# Altium PCB 第三版PCB_ASCII.pcbdoc (part 2 of 2)
Units mm, origin at the board's own origin, x right, y up, seen from the top; angles counter-clockwise.
Board outline 100 x 24 mm, 4 copper layers (Top Layer, GND, VCC, Bottom Layer), stack 0.568 mm thick; 97 components, 64 nets, 369 pads, 320 vias.
Unrouted connection lines stored in the file: 80.
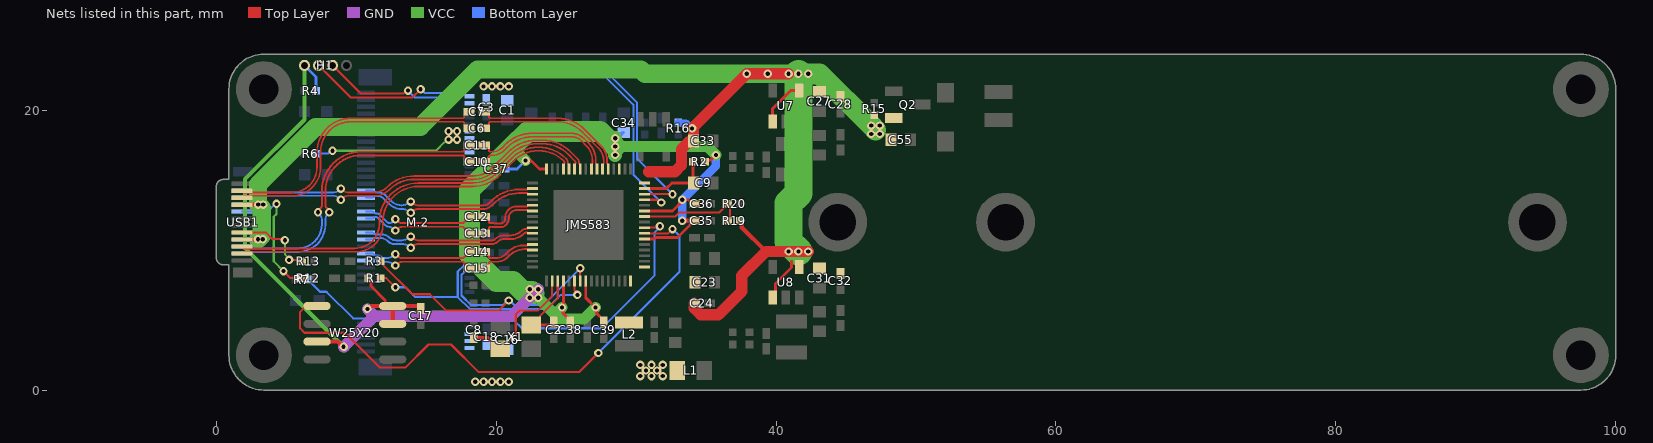
[diagram p4: the nets of this part, all layers, seen from the top]

## Via types
v1: diameter 0.6, hole 0.3, Top Layer to Bottom Layer, tented both sides, 320 vias

## Nets (pads, with @x,y where several pads share a name; then routed paths per layer and width w, separated by ;. In a path a pad name is that pad's centre, name@x,y a point inside that pad or via, vN(x,y) a via of type N, cw(c..) or ccw(c..) an arc to the next point about the centre after c; other vN are vias at no path point) (continued)
GPIO3: JMS583.7 W25X20.1 | length 40.7
  Top Layer w0.15: W25X20.1@7.195,6.005 6.415,6.005 5.995,5.584 5.995,4.405 6.3,4.1 9.2,4.1 11.7,1.6 13.5,1.6 15.16,3.26 16.766,3.26 18.726,1.3 25.95,1.3 v1(27.3,2.65) ; JMS583.7@30.6,11.2 32.287,11.2 32.587,11.5 v1(32.6,11.5)
  Bottom Layer w0.15: v1(27.3,2.65) 33.095,8.445 33.095,11.025 32.62,11.5 v1(32.6,11.5)
GPIO4: JMS583.8 R7.1 | length 32.6
  Top Layer w0.15: JMS583.8@30.6,11.6 30.625,11.625 31.625,11.625 v1(31.7,11.7)
  Bottom Layer w0.15: R7.1@6.533,7.9 7.408,7.025 7.844,7.025 7.869,7 7.9,7 9.775,5.125 11.443,5.125 11.603,4.965 21.303,4.965 21.848,4.42 27.543,4.42 31.3,8.177 31.3,11.251 31.7,11.651 v1(31.7,11.7)
GPIO6: JMS583.10 R19.2 R20.1 | length 7.7
  Top Layer w0.15: JMS583.10@30.6,12.4 32.8,12.4 33.1,12.7 35.954,12.7 36.554,13.3 R20.1@36.567,13.3 36.7,13.167 36.7,12.233 R19.2@36.567,12.1
GPIO8: H1.3 JMS583.13 | length 33.2
  Top Layer w0.15: H1.3@8.3,23.2 10.3,21.2 13.387,21.2 13.587,21.4 v1(13.7,21.4) ; JMS583.13@30.6,13.6 31.478,13.6 31.678,13.4 v1(31.8,13.4)
  Bottom Layer w0.15: v1(13.7,21.4) 14.2,20.9 16.9,20.9 18.4,22.4 27.8,22.4 29.8,20.4 29.8,15.4 v1(31.8,13.4)
GPIO9: H1.2 JMS583.14 | length 35.2
  Top Layer w0.15: H1.2@7.3,23.2 9.597,20.903 14.002,20.903 v1(14.6,21.5) ; JMS583.14@30.6,14 v1(32.6,14)
  Bottom Layer w0.15: v1(14.6,21.5) 14.635,21.5 14.913,21.223 16.723,21.223 18.2,22.7 27.9,22.7 30.07,20.53 30.07,16.53 v1(32.6,14)
LXO: JMS583.64 L2.2
M.2_3V3: C1.1 C3.2 C16.1 C18.2 L1.2 M.2.2 M.2.4 M.2.12 M.2.14 M.2.16 M.2.18 M.2.70 M.2.72 M.2.74 R6.1 | length 9.5
  VCC w0.15: v1(8.3,17.1) 15.7,17.1 16.3,17.7
  Bottom Layer w0.15: R6.1@7.133,16.9 7.978,16.9 8.178,17.1 v1(8.3,17.1)
  other v1: 18.5,0.6 19.1,0.6 19.7,0.6 20.3,0.6 20.9,0.6 30.3,1 31.1,1 31.9,1 30.7,1.4 31.5,1.4 30.3,1.8 31.1,1.8 31.9,1.8 16.6,17.9 17.2,17.9 16.6,18.5 17.2,18.5 19.1,21.7 19.7,21.7 20.3,21.7 20.9,21.7
N_P0_TX_N: C14.2 M.2.47 | length 8.2
  Top Layer w0.14: C14.2@17.841,9.812 17.796,9.766 ccw(c17.957,9.606) 17.73,9.606 17.73,9.57 cw(c17.59,9.57) 17.689,9.471 cw(c17.59,9.57) 17.59,9.43 13.303,9.43 cw(c13.303,9.891) 12.977,9.565 v1@12.872,9.67 ; C14.2@17.842,9.812 cw(c18.055,9.598) C14.2@18.055,9.9 ccw(c18.055,9.772) 17.965,9.863 C14.2@17.868,9.766 ; v1@12.872,9.67 ccw(c12.8,9.599) v1(12.8,9.7) cw(c12.8,9.599) v1@12.872,9.67
  Bottom Layer w0.14: M.2.47@10.7,9.75 11.115,9.75 cw(c11.115,9.545) 11.26,9.69 ccw(c11.405,9.835) 11.405,9.63 11.511,9.63 cw(c11.511,9.289) 11.753,9.53 ccw(c11.994,9.771) 11.994,9.43 12.17,9.43 ccw(c12.17,10.197) 12.713,9.655 12.728,9.67 cw(c12.8,9.599) v1(12.8,9.7)
N_P0_TX_P: C15.2 M.2.49 | length 8.2
  Top Layer w0.14: C15.2@17.841,8.788 17.796,8.834 cw(c17.957,8.994) 17.73,8.994 17.73,9.03 ccw(c17.59,9.03) 17.689,9.129 ccw(c17.59,9.03) 17.59,9.17 13.303,9.17 ccw(c13.303,8.709) 12.977,9.035 v1@12.872,8.93 ; C15.2@17.842,8.788 ccw(c18.055,9.002) C15.2@18.055,8.7 cw(c18.055,8.828) 17.964,8.737 C15.2@17.868,8.834 ; v1@12.872,8.93 cw(c12.8,9.001) v1(12.8,8.9) ccw(c12.8,9.001) v1@12.872,8.93
  Bottom Layer w0.14: M.2.49@10.7,9.25 11.115,9.25 ccw(c11.115,9.455) 11.26,9.31 cw(c11.405,9.165) 11.405,9.37 11.433,9.37 cw(c11.433,9.098) 11.625,9.29 11.645,9.27 ccw(c11.886,9.511) 11.886,9.17 12.148,9.17 cw(c12.148,8.35) 12.728,8.93 ccw(c12.8,9.001) v1(12.8,8.9)
N_P1_TX_N: C12.2 M.2.35 | length 8.4
  Top Layer w0.14: C12.2@17.841,12.312 17.796,12.266 ccw(c17.957,12.106) 17.73,12.106 17.73,12.07 cw(c17.59,12.07) 17.689,11.971 cw(c17.59,12.07) 17.59,11.93 13.303,11.93 cw(c13.303,12.391) 12.977,12.065 v1@12.872,12.17 ; C12.2@17.842,12.312 cw(c18.055,12.098) C12.2@18.055,12.4 ccw(c18.055,12.272) 17.965,12.363 C12.2@17.868,12.266 ; v1@12.872,12.17 ccw(c12.8,12.099) v1(12.8,12.2) cw(c12.8,12.099) v1@12.872,12.17
  Bottom Layer w0.14: M.2.35@10.7,12.75 11.115,12.75 cw(c11.115,12.545) 11.26,12.69 ccw(c11.405,12.835) 11.405,12.63 11.453,12.63 cw(c11.453,12.309) 11.68,12.536 12.214,12.002 ; 12.214,12.001 ccw(c12.387,12.174) 12.387,11.93 ccw(c12.387,12.174) 12.559,12.001 12.728,12.17 cw(c12.8,12.099) v1(12.8,12.2)
N_P1_TX_P: C13.2 M.2.37 | length 8.4
  Top Layer w0.14: C13.2@17.841,11.288 17.796,11.334 cw(c17.957,11.494) 17.73,11.494 17.73,11.53 ccw(c17.59,11.53) 17.689,11.629 ccw(c17.59,11.53) 17.59,11.67 13.303,11.67 ccw(c13.303,11.209) 12.977,11.535 v1@12.872,11.43 ; C13.2@17.842,11.288 ccw(c18.055,11.502) C13.2@18.055,11.2 cw(c18.055,11.328) 17.964,11.237 C13.2@17.868,11.334 ; v1@12.872,11.43 cw(c12.8,11.501) v1(12.8,11.4) ccw(c12.8,11.501) v1@12.872,11.43
  Bottom Layer w0.14: M.2.37@10.7,12.25 11.109,12.25 ccw(c11.109,12.469) 11.264,12.314 cw(c11.399,12.179) 11.399,12.37 cw(c11.399,12.179) 11.534,12.314 12.068,11.78 ccw(c12.333,12.044) 12.333,11.67 cw(c12.333,11.296) 12.598,11.56 12.728,11.43 ccw(c12.8,11.501) v1(12.8,11.4)
P0_RX_N: JMS583.41 M.2.41 | length 12.4
  Top Layer w0.14: v1(13.9,10.97) cw(c13.9,10.869) 13.972,10.94 14.077,10.835 ccw(c14.403,11.161) 14.403,10.7 19.216,10.7 ; 19.217,10.7 19.216,10.7 ; JMS583.41@22.6,11.6 22.35,11.6 ccw(c22.35,11.481) 22.265,11.565 cw(c22.18,11.65) 22.18,11.53 ccw(c22.18,11.008) 21.811,11.377 cw(c21.046,12.143) 21.046,11.06 20.583,11.06 ccw(c20.583,10.117) 19.916,10.784 cw(c19.714,10.986) 19.714,10.7 19.216,10.7
  Bottom Layer w0.14: M.2.41@10.7,11.25 11.115,11.25 cw(c11.115,11.045) 11.26,11.19 ccw(c11.405,11.335) 11.405,11.13 11.832,11.13 cw(c11.832,10.396) 12.351,10.915 ccw(c12.87,11.434) 12.87,10.7 13.248,10.7 ccw(c13.248,11.52) 13.828,10.94 cw(c13.9,10.869) v1(13.9,10.97)
P0_RX_P: JMS583.42 M.2.43 | length 12.4
  Top Layer w0.14: v1(13.9,10.17) ccw(c13.9,10.271) 13.972,10.2 14.077,10.305 cw(c14.403,9.979) 14.403,10.44 19.313,10.44 ; 19.323,10.44 19.714,10.44 ccw(c19.714,10.986) 20.1,10.6 cw(c20.583,10.117) 20.583,10.8 21.046,10.8 ccw(c21.046,12.143) 21.995,11.193 cw(c22.18,11.008) 22.18,11.27 cw(c22.18,11.151) 22.265,11.235 ccw(c22.35,11.32) 22.35,11.2 JMS583.42@22.6,11.2
  Bottom Layer w0.14: M.2.43@10.7,10.75 11.115,10.75 ccw(c11.115,10.955) 11.26,10.81 cw(c11.405,10.665) 11.405,10.87 11.674,10.87 cw(c11.674,10.015) 12.279,10.62 12.311,10.587 ccw(c12.666,10.943) 12.666,10.44 13.248,10.44 cw(c13.248,9.62) 13.828,10.2 ccw(c13.9,10.271) v1(13.9,10.17)
P0_TX_N: C14.1 JMS583.44 | length 4.2
  Top Layer w0.14: C14.1@19.306,9.792 19.236,9.862 ccw(c19.145,9.772) C14.1@19.145,9.9 cw(c19.145,9.598) 19.358,9.812 19.404,9.766 cw(c19.243,9.606) 19.47,9.606 19.47,9.57 ccw(c19.61,9.57) 19.511,9.471 ccw(c19.61,9.57) 19.61,9.43 19.936,9.43 ccw(c19.936,10.531) 20.715,9.753 20.843,9.88 cw(c21.929,8.794) 21.929,10.33 22.18,10.33 ccw(c22.18,10.449) 22.265,10.365 cw(c22.35,10.28) 22.35,10.4 JMS583.44@22.6,10.4
P0_TX_P: C15.1 JMS583.45 | length 4.2
  Top Layer w0.14: C15.1@19.306,8.808 19.236,8.738 cw(c19.145,8.828) C15.1@19.145,8.7 ccw(c19.145,9.002) 19.358,8.788 19.404,8.834 ccw(c19.243,8.994) 19.47,8.994 19.47,9.03 cw(c19.61,9.03) 19.511,9.129 cw(c19.61,9.03) 19.61,9.17 19.99,9.17 ccw(c19.99,10.401) 20.861,9.531 20.95,9.62 cw(c22.037,8.534) 22.037,10.07 22.18,10.07 cw(c22.18,9.95) 22.265,10.035 ccw(c22.35,10.119) 22.35,10 JMS583.45@22.6,10
P1_RX_N: JMS583.34 M.2.29 | length 12.7
  Top Layer w0.14: v1(13.9,13.47) cw(c13.9,13.369) 13.972,13.44 14.077,13.335 ccw(c14.403,13.661) 14.403,13.2 19.072,13.2 ccw(c19.072,13.828) 19.516,13.384 19.642,13.51 cw(c21.622,11.53) 21.622,14.33 22.18,14.33 ccw(c22.18,14.449) 22.265,14.365 cw(c22.35,14.28) 22.35,14.4 JMS583.34@22.6,14.4
  Bottom Layer w0.14: M.2.29@10.7,14.25 11.115,14.25 cw(c11.115,14.045) 11.26,14.19 ccw(c11.405,14.335) 11.405,14.13 11.603,14.13 cw(c11.603,13.447) 12.086,13.93 12.51,13.506 ccw(c13.248,14.244) 13.248,13.2 ccw(c13.248,14.02) 13.828,13.44 cw(c13.9,13.369) v1(13.9,13.47)
P1_RX_P: JMS583.35 M.2.31 | length 12.7
  Top Layer w0.14: v1(13.9,12.67) ccw(c13.9,12.771) 13.972,12.7 14.077,12.805 cw(c14.403,12.479) 14.403,12.94 19.072,12.94 ccw(c19.072,13.828) 19.7,13.2 19.826,13.326 cw(c21.622,11.53) 21.622,14.07 22.18,14.07 cw(c22.18,13.95) 22.265,14.035 ccw(c22.35,14.119) 22.35,14 JMS583.35@22.6,14
  Bottom Layer w0.14: M.2.31@10.7,13.75 11.115,13.75 ccw(c11.115,13.955) 11.26,13.81 cw(c11.405,13.665) 11.405,13.87 11.549,13.87 cw(c11.549,13.317) 11.94,13.708 12.326,13.322 ccw(c13.248,14.244) 13.248,12.94 cw(c13.248,12.12) 13.828,12.7 ccw(c13.9,12.771) v1(13.9,12.67)
P1_TX_N: C12.1 JMS583.37 | length 4.5
  Top Layer w0.14: C12.1@19.145,12.4 cw(c19.145,12.098) 19.358,12.312 19.378,12.292 cw(c19.156,12.07) 19.47,12.07 ccw(c19.61,12.07) 19.511,11.971 ccw(c19.61,12.07) 19.61,11.93 19.837,11.93 cw(c19.837,11.879) 19.873,11.915 ccw(c19.909,11.951) 19.909,11.9 20.3,11.9 ccw(c20.3,12.24) 20.64,12.24 20.64,12.3 cw(c21.47,12.3) 21.47,13.13 22.18,13.13 ccw(c22.18,13.25) 22.265,13.165 cw(c22.35,13.081) 22.35,13.2 JMS583.37@22.6,13.2
P1_TX_P: C13.1 JMS583.38 | length 4.5
  Top Layer w0.14: C13.1@19.145,11.2 ccw(c19.145,11.502) 19.358,11.288 19.378,11.308 ccw(c19.156,11.53) 19.47,11.53 cw(c19.61,11.53) 19.511,11.629 cw(c19.61,11.53) 19.61,11.67 19.729,11.67 cw(c19.729,11.619) 19.765,11.655 ccw(c19.801,11.691) 19.801,11.64 20.3,11.64 ccw(c20.3,12.24) 20.9,12.24 20.9,12.3 cw(c21.47,12.3) 21.47,12.87 22.18,12.87 cw(c22.18,12.75) 22.265,12.835 ccw(c22.35,12.92) 22.35,12.8 JMS583.38@22.6,12.8
PCIE_CLK: JMS583.55 M.2.52 R3.1 | length 24.1
  Top Layer w0.15: R3.1@11.733,9.2 11.746,9.2 11.941,9.005 11.941,8.929 14.02,6.85 15.25,6.85 16.4,5.7 20.2,5.7 v1(20.9,6.4) ; JMS583.55@26,7.8 v1(26,8.7)
  Bottom Layer w0.15: M.2.52@18.1,8.5 18.025,8.425 17.707,8.425 17.525,8.243 17.525,6.757 18.212,6.07 20.488,6.07 20.818,6.4 v1(20.9,6.4) 20.982,6.4 21.312,6.07 23.37,6.07 v1(26,8.7)
PCIE_RST: JMS583.54 M.2.50 R1.1 | length 19.4
  Top Layer w0.15: R1.1@11.746,8 11.748,7.997 12.153,7.997 v1(12.8,7.35) ; JMS583.54@25.6,7.8 25.6,7.122 25.8,6.922 v1(25.8,6.8)
  Bottom Layer w0.15: v1(12.8,7.35) 13.52,7.35 14.225,6.645 17.255,6.645 ; M.2.50@18.1,9 18.025,8.925 17.707,8.925 17.255,8.473 17.255,6.645 ; v1(25.8,6.8) 24.6,6.8 23.6,5.8 18.1,5.8 17.255,6.645
RST: C9.2 JMS583.15 R2.2 | length 5.2
  Top Layer w0.2: JMS583.15@30.6,14.4 32.15,14.4 32.55,14.8 C9.2@34.1,14.8 34.067,14.833 R2.2@34.067,16.3
RX1_N: JMS583.27 USB1.A3 | length 26.4
  Top Layer w0.125: v1(8.9,13.6) ccw(c8.9,13.674) 8.953,13.622 9.074,13.743 cw(c9.399,13.418) 9.399,13.877 11.288,13.877 ccw(c11.288,15.412) 12.373,14.327 cw(c14.131,12.569) 14.131,15.055 15.699,15.055 ; 15.901,15.055 15.699,15.055 ; JMS583.27@25.6,15.8 25.6,16.045 cw(c25.732,16.045) 25.639,16.139 ccw(c25.545,16.232) 25.678,16.232 ccw(c25.48,16.232) 25.62,16.372 25.136,16.856 ccw(c23.34,15.06) 23.34,17.6 22.852,17.6 ccw(c22.852,15.06) 21.056,16.856 19.9,15.7 cw(c18.343,17.257) 18.343,15.055 15.699,15.055
  Bottom Layer w0.125: USB1.A3@1.85,13.75 cw(c1.977,13.75) 1.977,13.877 8.395,13.877 cw(c8.395,13.404) 8.73,13.739 8.847,13.622 ccw(c8.9,13.674) v1(8.9,13.6)
RX1_P: JMS583.26 USB1.A2 | length 26.6
  Top Layer w0.125: v1(8.9,14.4) cw(c8.9,14.325) 8.953,14.378 9.074,14.257 ccw(c9.399,14.581) 9.399,14.122 11.288,14.122 ccw(c11.288,15.412) 12.2,14.5 cw(c14.131,12.569) 14.131,15.3 18.343,15.3 ccw(c18.343,17.257) 19.727,15.873 20.883,17.029 cw(c22.852,15.06) 22.852,17.845 23.34,17.845 cw(c23.34,15.06) 25.309,17.029 25.793,16.545 cw(c25.48,16.232) 25.923,16.232 ccw(c26.055,16.232) 25.961,16.139 cw(c25.868,16.045) 26,16.045 JMS583.26@26,15.8
  Bottom Layer w0.125: USB1.A2@1.85,14.25 ccw(c1.977,14.25) 1.977,14.122 8.395,14.122 ccw(c8.395,14.596) 8.73,14.261 8.847,14.378 cw(c8.9,14.325) v1(8.9,14.4)
RX2_N: JMS583.28 USB1.B3 | length 27.8
  Top Layer w0.125: USB1.B3@1.85,10.25 ccw(c1.977,10.25) 1.977,10.122 9.877,10.122 ccw(c9.877,11.9) 11.655,11.9 11.655,12.015 cw(c14.44,12.015) 14.44,14.8 18.301,14.8 ccw(c18.301,17.34) 20.098,15.544 21.147,16.594 cw(c22.961,14.78) 22.961,17.345 ; 22.99,17.345 23.062,17.345 cw(c23.062,14.615) 24.993,16.545 cw(c24.68,16.232) 25.122,16.232 ccw(c25.255,16.232) 25.161,16.139 cw(c25.068,16.045) 25.2,16.045 JMS583.28@25.2,15.8
RX2_P: JMS583.29 USB1.B2 | length 27.4
  Top Layer w0.125: USB1.B2@1.85,9.75 cw(c1.977,9.75) 1.977,9.877 9.979,9.877 ccw(c9.979,11.799) 11.9,11.799 11.9,12.015 cw(c14.44,12.015) 14.44,14.555 18.301,14.555 ccw(c18.301,17.34) 20.271,15.371 21.31,16.41 cw(c22.977,14.743) 22.977,17.1 23.062,17.1 cw(c23.062,14.615) 24.819,16.372 cw(c24.68,16.232) 24.877,16.232 cw(c24.745,16.232) 24.839,16.139 ccw(c24.932,16.045) 24.8,16.045 JMS583.29@24.8,15.8
TX1_N: C6.2 JMS583.22 | length 10.9
  Top Layer w0.125: C6.2@19.145,18.7 ccw(c19.145,19.002) 19.358,18.788 19.408,18.838 ccw(c19.24,19.006) 19.478,19.006 19.478,19.052 cw(c19.603,19.052) 19.514,19.141 cw(c19.603,19.052) 19.603,19.178 24.37,19.178 cw(c24.37,16.638) 26.166,18.434 26.628,17.972 ; 26.772,17.828 26.628,17.972 ; JMS583.22@27.6,15.8 27.6,16.045 cw(c27.732,16.045) 27.639,16.139 ccw(c27.545,16.232) 27.678,16.232 27.678,16.399 ccw(c26.413,16.399) 27.307,17.293 26.628,17.972
TX1_P: C7.2 JMS583.21 | length 11.1
  Top Layer w0.125: C7.2@19.145,19.9 cw(c19.145,19.598) 19.358,19.812 19.408,19.762 cw(c19.24,19.594) 19.478,19.594 19.478,19.548 ccw(c19.603,19.548) 19.514,19.459 ccw(c19.603,19.548) 19.603,19.423 24.37,19.423 cw(c24.37,16.637) 26.34,18.607 27.48,17.466 cw(c26.413,16.399) 27.923,16.399 27.923,16.232 ccw(c28.055,16.232) 27.961,16.139 cw(c27.868,16.045) 28,16.045 JMS583.21@28,15.8
TX2_N: C11.2 JMS583.23 | length 10.4
  Top Layer w0.125: C11.2@19.145,17.5 cw(c19.145,17.198) 19.358,17.412 19.408,17.362 cw(c19.24,17.194) 19.478,17.194 19.478,17.148 ccw(c19.603,17.148) 19.514,17.059 ccw(c19.603,17.148) 19.603,17.023 19.7,17.023 ccw(c19.7,18.043) 20.421,17.321 20.5,17.4 20.629,17.529 cw(c22.599,15.56) 22.599,18.345 25.376,18.345 cw(c25.376,17.076) 26.273,17.973 26.61,17.636 cw(c25.374,16.4) 27.122,16.4 27.122,16.232 ccw(c27.255,16.232) 27.161,16.139 cw(c27.068,16.045) 27.2,16.045 JMS583.23@27.2,15.8
TX2_P: C10.2 JMS583.24 | length 10
  Top Layer w0.125: C10.2@19.145,16.3 ccw(c19.145,16.602) C10.2@19.358,16.388 ; C10.2@19.359,16.388 19.408,16.438 ccw(c19.24,16.606) 19.478,16.606 19.478,16.652 cw(c19.603,16.652) 19.514,16.741 cw(c19.603,16.652) 19.603,16.778 19.7,16.778 ccw(c19.7,18.042) 20.594,17.148 20.803,17.356 cw(c22.599,15.56) 22.599,18.1 25.376,18.1 cw(c25.376,17.076) 26.1,17.8 26.437,17.463 cw(c25.374,16.4) 26.877,16.4 26.877,16.232 cw(c26.745,16.232) 26.839,16.139 ccw(c26.932,16.045) 26.8,16.045 JMS583.24@26.8,15.8
U_CC1: R12.1 USB1.A5 | length 9.4
  Top Layer w0.15: v1(4.8,8.5) 5.3,8 R12.1@6.134,8
  VCC w0.15: v1(4.3,13.303) 4.3,12.585 4.105,12.39 4.105,9.195 v1(4.8,8.5)
  Bottom Layer w0.15: USB1.A5@1.85,12.75 3.667,12.75 4.219,13.303 v1(4.3,13.303)
U_CC2: R13.1 USB1.B5 | length 5.8
  Top Layer w0.15: USB1.B5@1.85,11.25 2.75,11.25 2.77,11.27 3.53,11.27 4.016,10.784 4.816,10.784 v1(4.9,10.7) ; v1(5.2,9.3) 6.034,9.3 R13.1@6.134,9.2
  VCC w0.15: v1(4.9,10.7) 4.9,9.713 5.2,9.413 v1(5.2,9.3)
U_TX1_N: C6.1 USB1.B10 | length 20.2
  Top Layer w0.125: USB1.B10@1.85,13.75 cw(c1.977,13.75) 1.977,13.877 5.4,13.877 ccw(c5.4,15.922) 7.445,15.922 7.445,17 cw(c9.623,17) 9.623,19.178 12.099,19.178 ; 12.301,19.178 12.099,19.178 ; C6.1@17.841,18.788 17.792,18.838 cw(c17.96,19.006) 17.722,19.006 17.722,19.052 ccw(c17.597,19.052) 17.686,19.141 ccw(c17.597,19.052) 17.597,19.178 12.099,19.178 ; C6.1@17.842,18.788 ccw(c18.055,19.002) C6.1@18.055,18.7
U_TX1_P: C7.1 USB1.B11 | length 20
  Top Layer w0.125: USB1.B11@1.85,14.25 ccw(c1.977,14.25) 1.977,14.122 5.4,14.122 ccw(c5.4,15.922) 7.2,15.922 7.2,17 cw(c9.623,17) 9.623,19.423 17.597,19.423 ccw(c17.597,19.548) 17.686,19.459 ccw(c17.597,19.548) 17.722,19.548 17.722,19.594 cw(c17.96,19.594) 17.792,19.762 C7.1@17.841,19.812 ; C7.1@17.842,19.812 cw(c18.055,19.598) C7.1@18.055,19.9
U_TX2_N: C11.1 USB1.A10 | length 21.7
  Top Layer w0.14: v1(7.27,12.7) cw(c7.571,12.7) 7.358,12.912 7.465,13.02 ccw(c7.285,13.2) 7.54,13.2 7.54,14.23 cw(c10.34,14.23) 10.34,17.03 17.59,17.03 ccw(c17.59,17.17) 17.689,17.071 ccw(c17.59,17.17) 17.73,17.17 17.73,17.206 cw(c17.957,17.206) 17.796,17.366 C11.1@17.841,17.412 ; C11.1@17.842,17.412 cw(c18.055,17.198) C11.1@18.055,17.5
  Bottom Layer w0.14: USB1.A10@1.85,10.25 ccw(c1.97,10.25) 1.97,10.13 5.83,10.13 ccw(c5.83,11.84) 7.54,11.84 7.54,12.2 ccw(c7.086,12.2) 7.407,12.521 7.3,12.628 cw(c7.371,12.7) v1(7.27,12.7)
U_TX2_P: C10.1 USB1.A11 | length 21.7
  Top Layer w0.14: v1(8.07,12.7) ccw(c7.769,12.7) 7.982,12.912 7.875,13.02 cw(c8.055,13.2) 7.8,13.2 7.8,14.23 cw(c10.34,14.23) 10.34,16.77 17.59,16.77 cw(c17.59,16.63) 17.689,16.729 cw(c17.59,16.63) 17.73,16.63 17.73,16.594 ccw(c17.957,16.594) 17.796,16.434 C10.1@17.841,16.388 ; C10.1@17.842,16.388 ccw(c18.055,16.602) C10.1@18.055,16.3
  Bottom Layer w0.14: USB1.A11@1.85,9.75 cw(c1.97,9.75) 1.97,9.87 5.83,9.87 ccw(c5.83,11.84) 7.8,11.84 7.8,12.2 cw(c8.254,12.2) 7.933,12.521 8.04,12.628 ccw(c7.969,12.7) v1(8.07,12.7)
VBUS: C23.2 C24.2 C27.2 C28.2 C31.2 C32.2 C33.2 C55.2 JMS583.1 JMS583.16 Q2.2 R15.1 R16.1 R19.1 U7.1 U7.4 U8.1 U8.4 USB1.A4 USB1.A9 USB1.B4 USB1.B9 | length 109.8
  Top Layer w0.2: U8.1@39.75,6.6 39.95,6.8 39.95,7.604 41.1,8.754 41.1,9.2 ; U7.1@39.75,19.2 39.75,20.1 41.05,21.4 U7.4@41.65,21.4
  Top Layer w0.3: USB1.B4@1.85,10.75 3.3,10.75 v1(3.325,10.775) ; USB1.B9@1.85,13.25 2.6,13.25 v1(3,13.25) v1(3.35,13.25) ; R19.1@37.433,12.1 37.547,11.986 37.547,11.625 39.272,9.9
  Top Layer w0.8: 30.9,15.6 32.766,15.6 33.234,16.069 33.234,17.216 33.769,17.75 34.1,17.75 C33.2@34.1,17.8 ; C33.2@34.1,17.85 34.1,18.6 v1(34,18.7) v1(37.9,22.6) v1(39.4,22.6) v1(40.897,22.6) ; C24.2@34.155,6.2 34.155,5.847 34.622,5.38 35.868,5.38 37.545,7.057 37.545,8.173 39.272,9.9 v1(40.897,9.9) v1(41.597,9.9) v1(42.297,9.9)
  VCC w1.3: v1(2.975,10.775) 3.25,11.05 3.25,13 v1(3,13.25) ; v1@2.975,13.25 2.975,14.688 7.087,18.8 14.569,18.8 18.669,22.9 30.334,22.9 30.634,22.6 v1(37.9,22.6) 41.6,22.6 v1@42.3,22.6
  VCC w1.5: v1(41.597,22.6) 41.6,22.6 v1(42.297,22.6) ; 42.655,22.6 v1(42.297,22.6) ; 47.1,18.6 v1(46.8,18.9) 43.1,22.6 v1(42.297,22.6)
  VCC w2: v1@41.6,9.9 40.9,10.6 40.9,13.35 41.6,14.05 v1@41.6,22.6
  Bottom Layer w0.3: USB1.A9@1.85,10.75 3.3,10.75 v1(3.325,10.775) ; USB1.A4@1.85,13.25 v1(3.35,13.25)
  Bottom Layer w0.5: R16.1@33,19.133 33,19.12 33.02,19.1 33.573,19.1 33.973,18.7 v1(34,18.7)
  other v1: 46.8,18.3 47.4,18.3 47.4,18.9
VCC: C17.2 C34.2 C35.2 C36.2 C37.2 C38.2 C39.2 H1.1 JMS583.6 JMS583.11 JMS583.19 JMS583.32 JMS583.52 JMS583.56 R1.2 R2.1 R4.1 W25X20.3 W25X20.7 W25X20.8 | length 119.4
  Top Layer w0.2: R1.2@10.867,8 10.88,8 11.05,7.83 11.05,7.43 12.072,6.408 12.072,6.175 12.243,6.005 W25X20.8@12.605,6.005 ; v1(22.1,16.4) 22.124,16.376 22.524,16.376 23.1,15.8 JMS583.32@23.6,15.8 ; JMS583.52@24.8,7.8 24.8,6.108 24.7,6.008 v1(24.7,5.9) 24.777,5.823 24.777,5.494 25.3,4.97 C38.2@25.3,4.845 ; JMS583.56@26.4,7.8 26.4,6.6 v1(27.1,5.9) 27.177,5.823 27.177,5.494 27.7,4.97 C39.2@27.7,4.845 ; JMS583.6@30.6,10.8 31.283,10.8 31.383,10.9 32.955,10.9 33.86,11.805 33.86,11.93 34.03,12.1 C35.2@34.155,12.1 ; JMS583.11@30.6,12.8 32.6,12.8 33.4,13.6 33.406,13.594 33.743,13.594 33.86,13.477 33.86,13.47 34.03,13.3 C36.2@34.155,13.3 ; R2.1@34.933,16.3 35.058,16.426 35.326,16.426 v1(35.7,16.8)
  Top Layer w0.3: W25X20.3@7.195,3.465 8.656,3.465 9.021,3.1 v1(9.1,3.1) ; v1(10.8,5.8) 10.881,5.8 11.086,6.005 W25X20.8@12.243,6.005 ; W25X20.7@12.605,4.735 W25X20.8@12.605,6.005 14.48,6.005 14.6,5.885 C17.2@14.6,5.845 ; v1(33.3,12.1) C35.2@34.03,12.1
  GND w0.8: v1(9.1,3.1) 9.14,3.1 11.32,5.28 ; v1(10.8,5.8) 11.32,5.28 ; v1(23,7.2) v1(22.4,6.6) 21.08,5.28 11.32,5.28
  VCC w0.3: H1.1@6.3,23.198 6.3,19.314 2.055,15.069 2.055,10.145 v1(9.1,3.1)
  VCC w0.8: 21.146,17.354 v1(22.1,16.4) ; v1(23,6.6) 24.52,5.08 ; v1(24.7,5.9) 24.52,5.72 24.52,5.08 ; v1(27.1,5.9) 26.28,5.08 24.52,5.08 ; v1(28.5,17.4) 35.1,17.4 v1(35.7,16.8)
  VCC w1: v1(28.5,16.8) v1(28.5,17.4) v1(28.5,18)
  VCC w1.5: 22.7,6.9 22.57,7.03 21.925,7.03 21.185,7.77 20.03,7.77 18.1,9.7 18.1,14.309 21.146,17.354 22.261,18.47 27.43,18.47 v1(28.5,17.4)
  Bottom Layer w0.2: H1.1@6.3,23.2 7.133,22.367 R4.1@7.133,21.4 ; C37.2@20.545,15.8 21.5,15.8 v1(22.1,16.4) ; C34.2@28.759,18.259 v1(28.5,18) 28.608,18 28.708,18.1 28.8,18.1 C34.2@29.1,18.4 ccw(c29.1,17.917) C34.2@28.759,18.259
  Bottom Layer w0.6: v1(33.3,12.1) v1(33.3,13.6) 35.7,16 v1(35.7,16.8)
  other v1: 22.4,7.2
XIN: C8.2 JMS583.50 X1.1 | length 9.4
  Top Layer w0.15: X1.1@20.3,2.95 20.4,2.95 21.4,3.95 21.4,5.4 21.7,5.7 23,5.7 23.975,6.675 23.975,7.775 JMS583.50@24,7.8
  Top Layer w0.2: C8.2@18.4,3.755 19.395,3.755 20.2,2.95 X1.1@20.3,2.95
XOUT: C2.2 JMS583.51 X1.3 | length 5.6
  Top Layer w0.15: X1.3@22.5,4.65 22.6,4.65 23.125,5.175 23.125,5.275 24.4,6.55 JMS583.51@24.4,7.8
  Top Layer w0.2: X1.3@22.6,4.65 23.93,4.65 24.1,4.82 C2.2@24.1,4.845
pads on no net: JMS583.9 JMS583.12 JMS583.57 JMS583.58 JMS583.59 M.2.5 M.2.6 M.2.7 M.2.8 M.2.10 M.2.11 M.2.13 M.2.17 M.2.19 M.2.20 M.2.22 M.2.23 M.2.24 M.2.25 M.2.26 M.2.28 M.2.30 M.2.32 M.2.34 M.2.36 M.2.38 M.2.40 M.2.42 M.2.44 M.2.46 M.2.48 M.2.54 M.2.56 M.2.58 M.2.67 M.2.68 M.2.69 USB1.A8 USB1.B8

## Polygon pours and split planes (outlines as drawn)
GND on Bottom Layer "NONET_L-01_P-001" (solid, remove dead copper, pour order 5): 0,9.45 ccw(c0.5,9.45) 0.5,8.95 0.9,8.95 0.9,2.5 ccw(c3.4,2.5) 3.4,0 97.5,0 ccw(c97.5,2.5) 100,2.5 100,21.5 ccw(c97.5,21.5) 97.5,24 3.4,24 ccw(c3.4,21.5) 0.9,21.5 0.9,15.05 0.5,15.05 ccw(c0.5,14.55) 0,14.55
GND on Top Layer "NONET_L-01_P-001" (solid, remove dead copper, pour order 7): 0,9.45 ccw(c0.5,9.45) 0.5,8.95 0.9,8.95 0.9,2.5 ccw(c3.4,2.5) 3.4,0 97.5,0 ccw(c97.5,2.5) 100,2.5 100,21.5 ccw(c97.5,21.5) 97.5,24 3.4,24 ccw(c3.4,21.5) 0.9,21.5 0.9,15.05 0.5,15.05 ccw(c0.5,14.55) 0,14.55
GND on GND "NONET_L-01_P-001" (solid, remove dead copper, pour order 6): 0,9.45 ccw(c0.5,9.45) 0.5,8.95 0.9,8.95 0.9,2.5 ccw(c3.4,2.5) 3.4,0 97.5,0 ccw(c97.5,2.5) 100,2.5 100,21.5 ccw(c97.5,21.5) 97.5,24 3.4,24 ccw(c3.4,21.5) 0.9,21.5 0.9,15.05 0.5,15.05 ccw(c0.5,14.55) 0,14.55
GND on VCC "NONET_L-01_P-001" (solid, remove dead copper, pour order 4): 0,9.45 ccw(c0.5,9.45) 0.5,8.95 0.9,8.95 0.9,2.5 ccw(c3.4,2.5) 3.4,0 97.5,0 ccw(c97.5,2.5) 100,2.5 100,21.5 ccw(c97.5,21.5) 97.5,24 3.4,24 ccw(c3.4,21.5) 0.9,21.5 0.9,15.05 0.5,15.05 ccw(c0.5,14.55) 0,14.55

## Other copper
Top Layer:
  region net $1N23334: 52.7,21.935 50.96,21.935 49.775,20.75 49.775,20.05 51.025,18.8 56.9,18.8 56.9,19.8 53.7,19.8 52.7,20.8
  region net VBUS: 49.025,19.8 47.42,19.8 47.27,19.95 46.73,19.95 46.73,19.23 46.5,19 46.5,18.1 47.15,17.45 48.6,17.45 48.6,18.675 49.025,19.1
  region net VBUS: 34.1,19.4 32.9,18.2 32.9,17.35 33.7,17.35 34.4,18.05 34.4,19.4
  region net VBUS: 30.2,8.9 30.3,8.8 31,8.8 31.6,8.2 34.6,8.2 34.6,6.25 34.25,5.9 32.9,5.9 32.1,6.7 31.9,6.7 30.2,8.4
  region net GND: 1.1,14.75 1.075,14.775 1.075,17.6 1.375,17.9 2.475,17.9 2.675,17.7 2.675,14.9 2.525,14.75
  region net GND: 1.1,9.25 2.525,9.25 2.675,9.1 2.675,6.5 2.375,6.2 1.375,6.2 1.075,6.5 1.075,9.225
  region net VCC: 28.65,18.35 28.35,18.35 28.15,18.15 28.15,16.65 28.4,16.4 28.521,16.4 28.7,16.221 28.7,15.8 28.9,15.8 28.9,18.1
  region net VBUS: 30.2,14.7 31,14.7 31.5,15.3 31.5,16.1 30.8,16.1 30.2,15.5
  region net LXO: 29.5,8.2 29.5,7.2 29.2,6.9 29.2,5.6 28.6,5 28.6,4.4 30.4,4.4 30.5,4.5 30.5,7.6 29.9,8.2
  region net AVDDL: 28.5,3.6 30.6,3.6 31.1,4.1 31.6,4.1 31.9,3.8 32.9,3.8 33.2,3.5 33.2,3.4 32.1,2.3 29.5,2.3 28.9,2.9
  region net VBUS: 44.95,7.925 44.05,7.925 43.65,8.325 41.25,8.325 40.55,9.025 40.55,10.025 40.85,10.325 42.55,10.325 44.05,8.825 44.95,8.825
  region net M.2_3V3: 33.5,2.1 30.1,2.1 30,2 30,0.8 30.1,0.7 33.5,0.7
  region net 3V3: 34.3,2.1 36.9,2.1 37.9,3.1 38.139,3.3 42.2,3.3 42.6,3.7 42.6,4.6 44,4.6 44.4,5 44.9,5 44.9,2.6 43,0.7 34.3,0.7
  region net GND: 44.9,5.2 42.6,5.2 42.6,6.9 42.2,7.3 41.2,7.3 41,7.1 41,6.1 40.4,6.1 40.4,7.7 40.7,8 43.5,8 43.8,7.7 44.9,7.7
  region net $1N10317: 42,7.1 42,5.7 42.2,5.5 42.2,4.4 40,4.4 40,5.5 40.7,5.5 41.4,6.2 41.4,7.1
  region net AVDDL: 44.9,17.6 44.3,17.6 43.9,17.2 42.7,17.2 42.7,16.5 42,15.8 40,15.8 39.8,16 38.6,16 38.4,16.2 37.8,16.2 37.8,14 38,13.8 39.1,13.8 39.8,14.5 42.6,14.5 44.9,16.8
  region net $1N11538: 42,19.7 42,18.3 42.2,18.1 42.2,17 40,17 40,18.1 40.7,18.1 41.4,18.8 41.4,19.7
  region net GND: 44.9,17.8 42.6,17.8 42.6,19.5 42.2,19.9 41.2,19.9 41,19.7 41,18.7 40.4,18.7 40.4,20.3 40.7,20.6 43.5,20.6 43.8,20.3 44.9,20.3
  region net VBUS: 44.95,20.525 44.05,20.525 43.65,20.925 41.25,20.925 40.55,21.625 40.55,22.75 40.8,23 42.475,23 44.05,21.425 44.95,21.425
VCC:
  rectangle net AVDDL: 30.7,2.8 32.1,3.8
  region net VBUS: 41.6,22.6 41.6,20.1 44.7,20.1 45.1,20.5 43,22.6 42.655,22.6
  region net M.2_3V3: 32.1,2.2 17.7,2.2 17.7,0.8 18.2,0.3 31.8,0.3 32.4,0.9 32.4,1.9
  region net M.2_3V3: 21.3,21.8 21,22.1 19,22.1 15.9,19 15.9,17.4 16.2,17.1 17.4,17.1 17.7,17.4 17.7,18 21.3,21.6
  region net M.2_3V3: 21,0.3 21.5,0.8 21.5,1.3 19.7,3.1 19.4,3.1 17,5.5 17,16.7 17.7,17.4 17.7,19.1 16,19.1 15.3,18.4 15.3,4.1 17.7,1.7 17.7,0.8 18.2,0.3
Bottom Layer:
  region net GND: 1.1,14.75 1.075,14.775 1.075,17.6 1.375,17.9 2.475,17.9 2.675,17.7 2.675,14.9 2.525,14.75
  region net GND: 1.1,9.25 2.525,9.25 2.675,9.1 2.675,6.5 2.375,6.2 1.375,6.2 1.075,6.5 1.075,9.225
  region net M.2_3V3: 21.4,3.3 20.1,3.3 19.7,3.7 19,3.7 18.543,4.157 17.7,4.157 17.7,0.8 18.2,0.3 21.2,0.3 21.4,0.5 21.4,2.5
  region net M.2_3V3: 17.7,20.3 17.7,21 18.8,22.1 21,22.1 21.3,21.8 21.3,21.5 21.3,20.3 18.4,20.3
  region net M.2_3V3: 18.5,18.7 18.5,16.8 17.7,16.8 17,17.5 16.4,17.5 16.2,17.7 16.2,18.7 16.4,18.9 17.4,18.9 17.6,18.7

## Silkscreen, mask and mechanical layers (free items; w line width, h text height)
Top Silkscreen Layer:
  lines w0.1: 33.3,11.4 38.2,11.4 38.2,14 33.3,14 33.3,11.4 ; 47.3,10.6 53.4,10.6 53.4,13.4 47.3,13.4 47.3,10.6
  lines w0.2: 39.1,11.3 38.4,12 ; 39.1,12.7 38.4,12 ; 47.3,12 38.4,12
  lines w0.254: 54.7,18.6 54.7,22 57.1,22 57.1,18.6 54.7,18.6
  text "-" at 56.868,22 h2 r90.01
  text "+" at 56.9,16.7 h2 r90
Bottom Silkscreen Layer:
  text "2230" at 48.046,14.354 h2
  text "2242" at 60.146,14.354 h2
  text "2280" at 98.046,14.354 h2
Mechanical Layer:
  drawing of 123 lines, arcs and shapes, not listed
  text "99,1" at 47.447,51.044 h2.5
  text "94,1" at 47.447,43.997 h2.5
  text "80" at 52.615,36.273 h2.5
  text "42" at 33.575,31.861 h2.5
  text "R2,5" at 101.411,29.45 h2.5 r40.84
  text "0,9" at -10.18,27.555 h2.5
  text "13,5" at 4.515,27.555 h2.5
  text "30" at 27.617,27.288 h2.5
  text "6,1" at -7.865,10.75 h2.5 r90
  text "19" at 102.102,10.75 h2.5 r90
  text "24" at 107.028,10.75 h2.5 r90
  text "∅2,05" at 103.648,-5.159 h2.5 r319.25
  text "∅4" at 86.48,-5.242 h2.5 r46.62
Mechanical 2:
  circle w0.006: c98.4,21.5 r0.003
  circle w0.006: c100.366,23.044 r0.003
  circle w0.006: c62.9,2.5 r0.003
  circle w0.006: c0.9,2.5 r0.003
  circle w0.006: c50.9,2.5 r0.003
  circle w0.006: c0.9,2.5 r0.003
  circle w0.006: c60.4,2.5 r0.003
  circle w0.006: c3.4,2.5 r0.003
  circle w0.006: c48.4,2.5 r0.003
  circle w0.006: c3.4,2.5 r0.003
  circle w0.006: c14.4,26.636 r0.003
  circle w0.006: c14.4,21.5 r0.003
  circle w0.006: c0.9,21.5 r0.003
  circle w0.006: c99.752,3.974 r0.003
  circle w0.006: c97.048,1.026 r0.003
  circle w0.006: c97.703,3.252 r0.003
  circle w0.006: c99.097,1.748 r0.003
  circle w0.006: c110.788,0 r0.003
  circle w0.006: c98.4,0 r0.003
  circle w0.006: c98.4,24 r0.003
  circle w0.006: c105.349,2.5 r0.003
  circle w0.006: c98.4,2.5 r0.003
  circle w0.006: c98.4,21.5 r0.003
  circle w0.006: c98.4,44.811 r0.003
  circle w0.006: c98.4,21.5 r0.003
  circle w0.006: c3.4,21.5 r0.003
  circle w0.006: c100.9,49.917 r0.003
  circle w0.006: c100.9,21.5 r0.003
  circle w0.006: c0.9,21.5 r0.003
  circle w0.006: c94.4,35.621 r0.003
  circle w0.006: c94.4,12 r0.003
  circle w0.006: c14.4,12 r0.003
  circle w0.006: c56.4,31.231 r0.003
  circle w0.006: c56.4,12 r0.003
  circle w0.006: c14.4,12 r0.003
  circle w0.006: c44.4,26.636 r0.003
  circle w0.006: c44.4,12 r0.003
  circle w0.006: c14.4,12 r0.003